# EAGLE board Sync-Combiner (EAGLE 9.6.2)
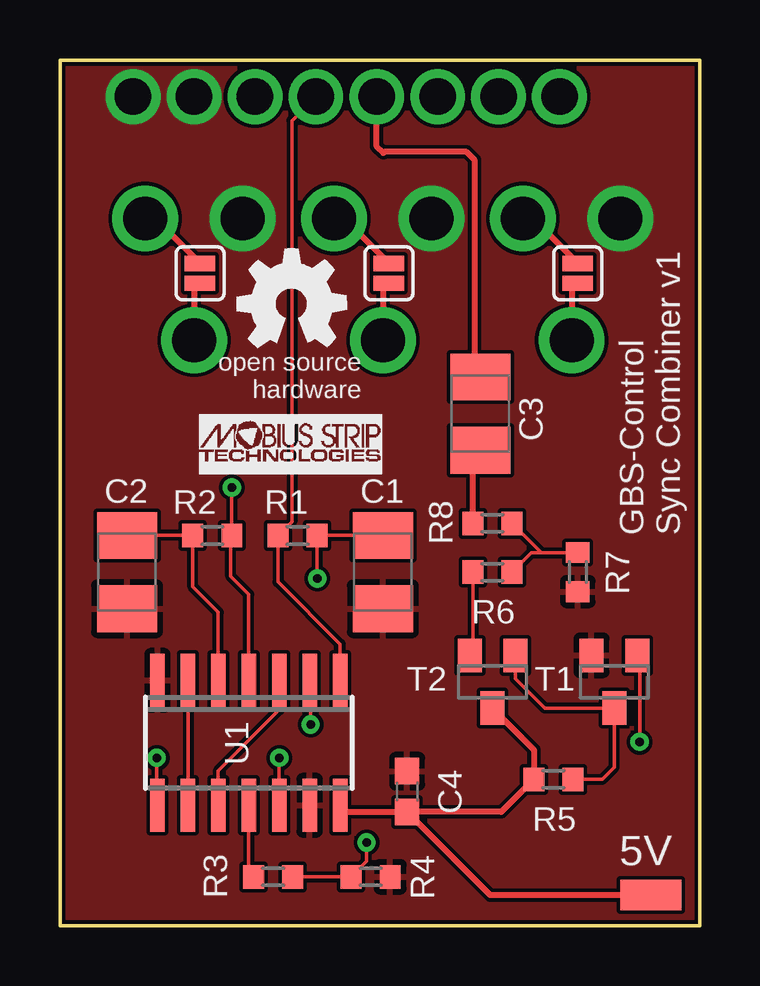
[diagram p0: board, top side]
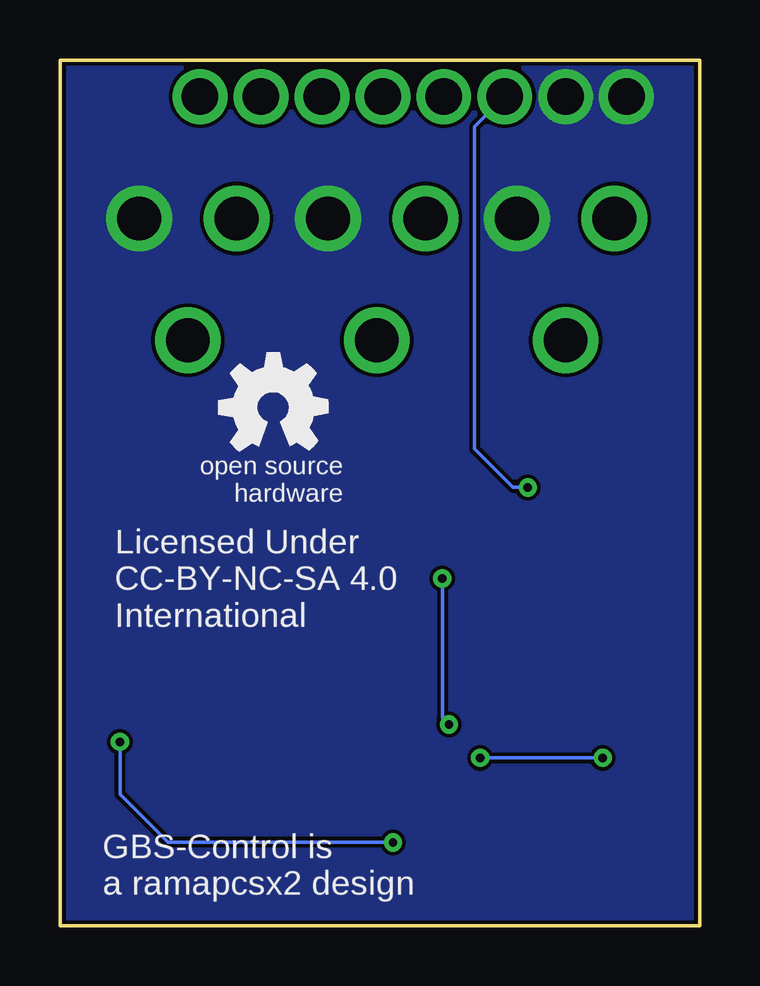
[diagram p1: board, bottom side, seen from below]

Size 26.67 x 36.07 mm. Coordinates in mm from the lower left corner, seen from the top.
Outline: 0,0 0,36.07 26.67,36.07 26.67,0 0,0
Copper layers (1*16): Top 0.035mm / dielectric 1.5mm / Bottom 0.035mm
Design rules "default *": minimum track width 6mil, minimum drill 0.35mm, track to track 6mil, track to pad 6mil, pad to pad 6mil, via to via 6mil, smd to smd 6mil, copper to edge 6mil, drill to drill 6mil, minimum pad ring 10mil, minimum via ring 8mil, stop-mask expansion 4mil, vias tented up to drill 20mil, thermal gap 10mil

## Footprints (pad centres in the part's own frame; a part is rotated, then mirrored left to right if it is on the bottom)
SMD1,27-2,54 = smd 1.27 x 2.54: 1 0,0
B/3528-21R = smd 1.95 x 2.5: + 1.525,0; - -1.525,0
C0603 = smd 1.1 x 1: 1 -0.85,0; 2 0.85,0
SJ_2S = smd 0.635 x 1.27: 1 -0.412,0; 2 0.412,0
R0603 = smd 0.87 x 0.98: 1 -0.815,0; 2 0.815,0
SOT23 = smd 1 x 1.4: 1 -0.95,-1.1; 2 0.95,-1.1; 3 0,1.1
SO14 = smd 0.6 x 2.2: 1 -3.81,-2.6; 2 -2.54,-2.6; 3 -1.27,-2.6; 4 0,-2.6; 5 1.27,-2.6; 6 2.54,-2.6; 7 3.81,-2.6; 8 3.81,2.6; 9 2.54,2.6; 10 1.27,2.6; 11 0,2.6; 12 -1.27,2.6; 13 -2.54,2.6; 14 -3.81,2.6

## Placement (x,y rotation side)
5V  [SMD1,27-2,54]  24.64,1.27 90 top
C1  [B/3528-21R]  13.46,14.73 90 top
C2  [B/3528-21R]  2.79,14.73 90 top
C3  [B/3528-21R]  17.53,21.34 270 top
C4  [C0603]  14.48,5.59 270 top
E$1  [TEST]  5.55,18.4 0 top
E$2  [OSHW_5MM]  9.65,25.91 0 top
E$3  [SJ_2S]  21.59,27.18 90 top
E$4  [OSHW_5MM]  17.78,21.59 0 bottom
J1  [SJ_2S]  5.84,27.18 90 top
J2  [SJ_2S]  13.72,27.18 90 top
R1  [R0603]  9.91,16.26 180 top
R2  [R0603]  6.35,16.26 0 top
R3  [R0603]  8.89,2.03 0 top
R4  [R0603]  12.95,2.03 180 top
R5  [R0603]  20.57,6.1 0 top
R6  [R0603]  18.03,14.73 180 top
R7  [R0603]  21.59,14.73 270 top
R8  [R0603]  18.03,16.76 0 top
T1  [SOT23]  23.11,10.16 180 top
T2  [SOT23]  18.03,10.16 180 top
U1  [SO14]  7.87,7.62 180 top

## Library data of the parts
5V = wirepad
C1-C3 = ref-packages-longpad
C4 T1 T2 = adafruit
E$1 E$2 E$4 = oshw
E$3 J1 J2 = SparkFun-Retired
R1-R8 = smd-ipc
U1 = analog-devices

## Nets
5V: 5V.1 C4.2 R5.1 T2.3 U1.14
CSYNC: C3.-
GND: C1.- C2.- C4.1 R4.1 R7.2 T1.2 U1.7 U1.13
HSYNC: R1.2 U1.1
J1-1: J1.1
J1-2: J1.2
J2-1: J2.1
J2-2: J2.2
J3-1: E$3.1
J3-2: E$3.2
S$1: C2.+ R2.1 U1.5
S$2: U1.8 U1.12
S$3: C1.+ R1.1 U1.2
S$5: U1.3 U1.10
S$6: U1.6 U1.9
S$7: R3.2 R4.2 T1.1
S$8: R3.1 U1.11
S$9: R5.2 T1.3 T2.1
S$10: R6.2 T2.2
S$11: R6.1 R7.1 R8.2
S$12: C3.+ R8.1
VSYNC: R2.2 U1.4

## Tracks (layer width: path | path; a pad name or v marks a point on that pad's centre or on a via)
5V
  Top 0.254: U1.14 11.97,4.74 C4.2 | C4.2 18.4,4.74 R5.1 19.76,7.34 T2.3 | C4.2 17.95,1.27 5V.1
CSYNC  (via drill 1.52)
  Top 0.254: v13.21,34.54 13.21,32.47 13.48,32.2 13.52,32.24 16.96,32.24 17.27,31.92 17.27,23.11 C3.-
GND  (via drill 1.52, 1.83)
  other vias: 3.05,34.54 5.59,34.54 7.62,29.46 15.49,29.46 23.37,29.46
  pour Top: -1.27,35.56 -1.27,-1.27 27.94,-1.27 27.94,36.83 -1.27,36.83
  pour Bottom: -1.27,35.56 -1.27,-1.27 27.94,-1.27 27.94,36.83 -1.27,36.83
HSYNC  (via drill 1.52)
  Top 0.152: U1.1 11.68,11.73 9.09,14.32 R1.2 9.67,16.83 9.67,33.54 v10.67,34.54
J1-1  (via drill 1.83)
  Top 0.254: J1.1 5.59,26.51 v5.59,24.38
J1-2  (via drill 1.83)
  Top 0.254: J1.2 3.97,29.46 v3.56,29.46
J2-1  (via drill 1.83)
  Top 0.254: J2.1 13.46,26.51 v13.46,24.38
J2-2  (via drill 1.83)
  Top 0.254: J2.2 11.84,29.46 v11.43,29.46
J3-1  (via drill 1.83)
  Top 0.254: E$3.1 21.34,26.51 v21.34,24.38
J3-2  (via drill 1.83)
  Top 0.254: E$3.2 19.72,29.46 v19.3,29.46
S$1
  Top 0.152: C2.+ R2.1 5.54,14.12 6.6,13.05 U1.5
S$2  (via drill 0.35)
  Top 0.152: U1.12 v9.14,6.99 v9.15,6.99 | v4.04,6.99 4.04,5.05 U1.8
  Bottom 0.152: v9.15,6.99 v4.04,6.99
S$3  (via drill 0.35)
  Top 0.152: C1.+ R1.1 v10.72,14.47 v10.73,14.46 | v10.45,8.38 10.45,10.18 U1.2
  Bottom 0.152: v10.73,14.46 10.73,8.66 v10.45,8.38
S$5
  Top 0.152: U1.3 9.14,8.99 6.6,6.45 U1.10
S$6
  Top 0.152: U1.6 U1.9
S$7  (via drill 0.35)
  Top 0.152: R3.2 R4.2 12.78,2.68 v12.78,3.46 | v24.17,7.66 24.17,11.15 T1.1
  Bottom 0.152: v12.78,3.46 22.17,3.46 24.17,5.46 v24.17,7.66
S$8
  Top 0.152: U1.11 7.87,2.26 8.07,2.06 R3.1
S$9
  Top 0.152: T2.1 18.98,10.29 20.21,9.06 T1.3 23.11,6.6 22.61,6.1 R5.2
S$10
  Top 0.152: R6.2 17.22,11.39 T2.2
S$11
  Top 0.152: R6.1 19.66,15.55 R7.1 20.07,15.55 R8.2
S$12
  Top 0.254: R8.1 17.22,19.5 C3.+
S$17  (via drill 1.52)
  other vias: 15.75,34.54
S$18  (via drill 1.52)
  other vias: 18.29,34.54
S$19  (via drill 1.52)
  other vias: 20.83,34.54
VSYNC  (via drill 0.35, 1.52)
  Top 0.152: U1.4 7.87,13.8 7.12,14.55 7.12,16.21 R2.2 v7.16,18.26
  Bottom 0.152: v7.16,18.26 7.78,18.26 9.38,19.86 9.38,33.29 v8.13,34.54

## Text on the board
tNames: GBS-Control / Sync Combiner v1
bNames: Licensed Under / CC-BY-NC-SA 4.0 / International | GBS-Control is / a ramapcsx2 design